# Altium PCB PCB_2020-04-05 13_27_25.pcbdoc
Units mil, origin at the board's own origin, x right, y up, seen from the top; angles counter-clockwise.
Board outline 12860 x 8910 mil, 2 copper layers (Top Layer, Bottom Layer); 150 components, 113 nets, 598 pads, 154 vias.
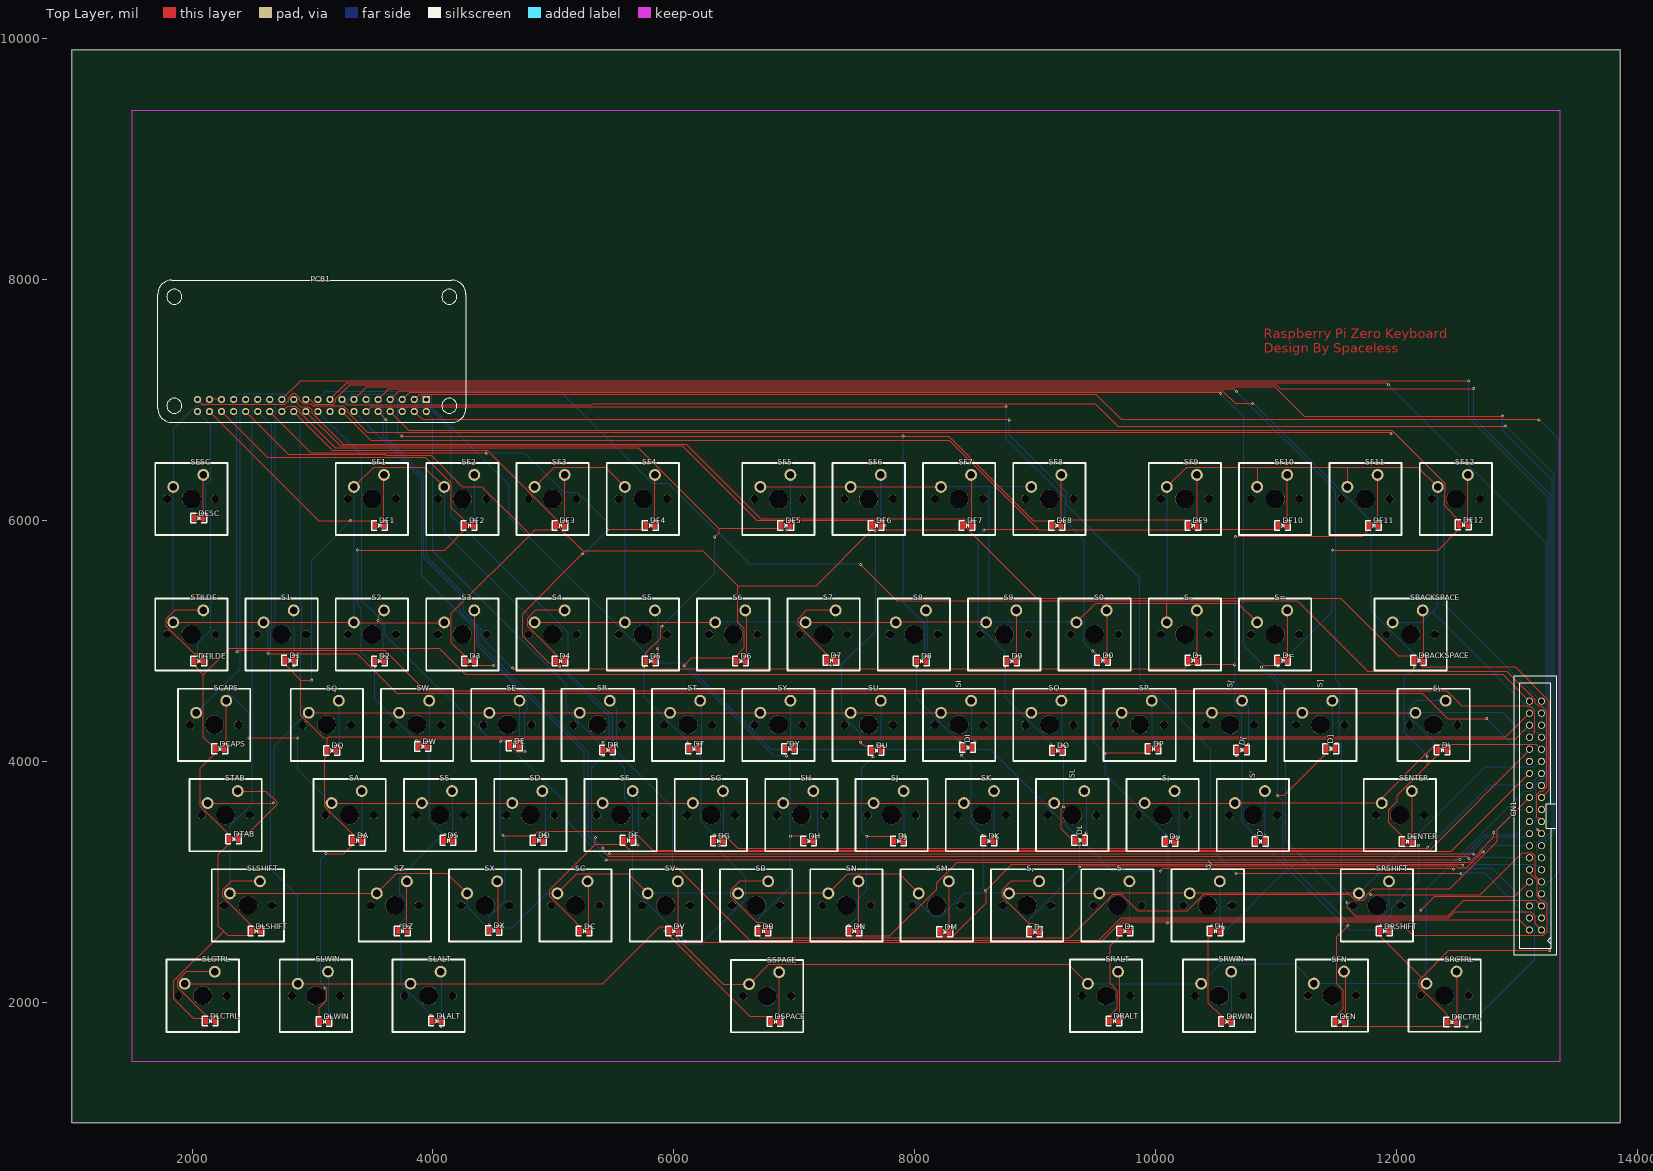
[diagram p0: Top Layer view]
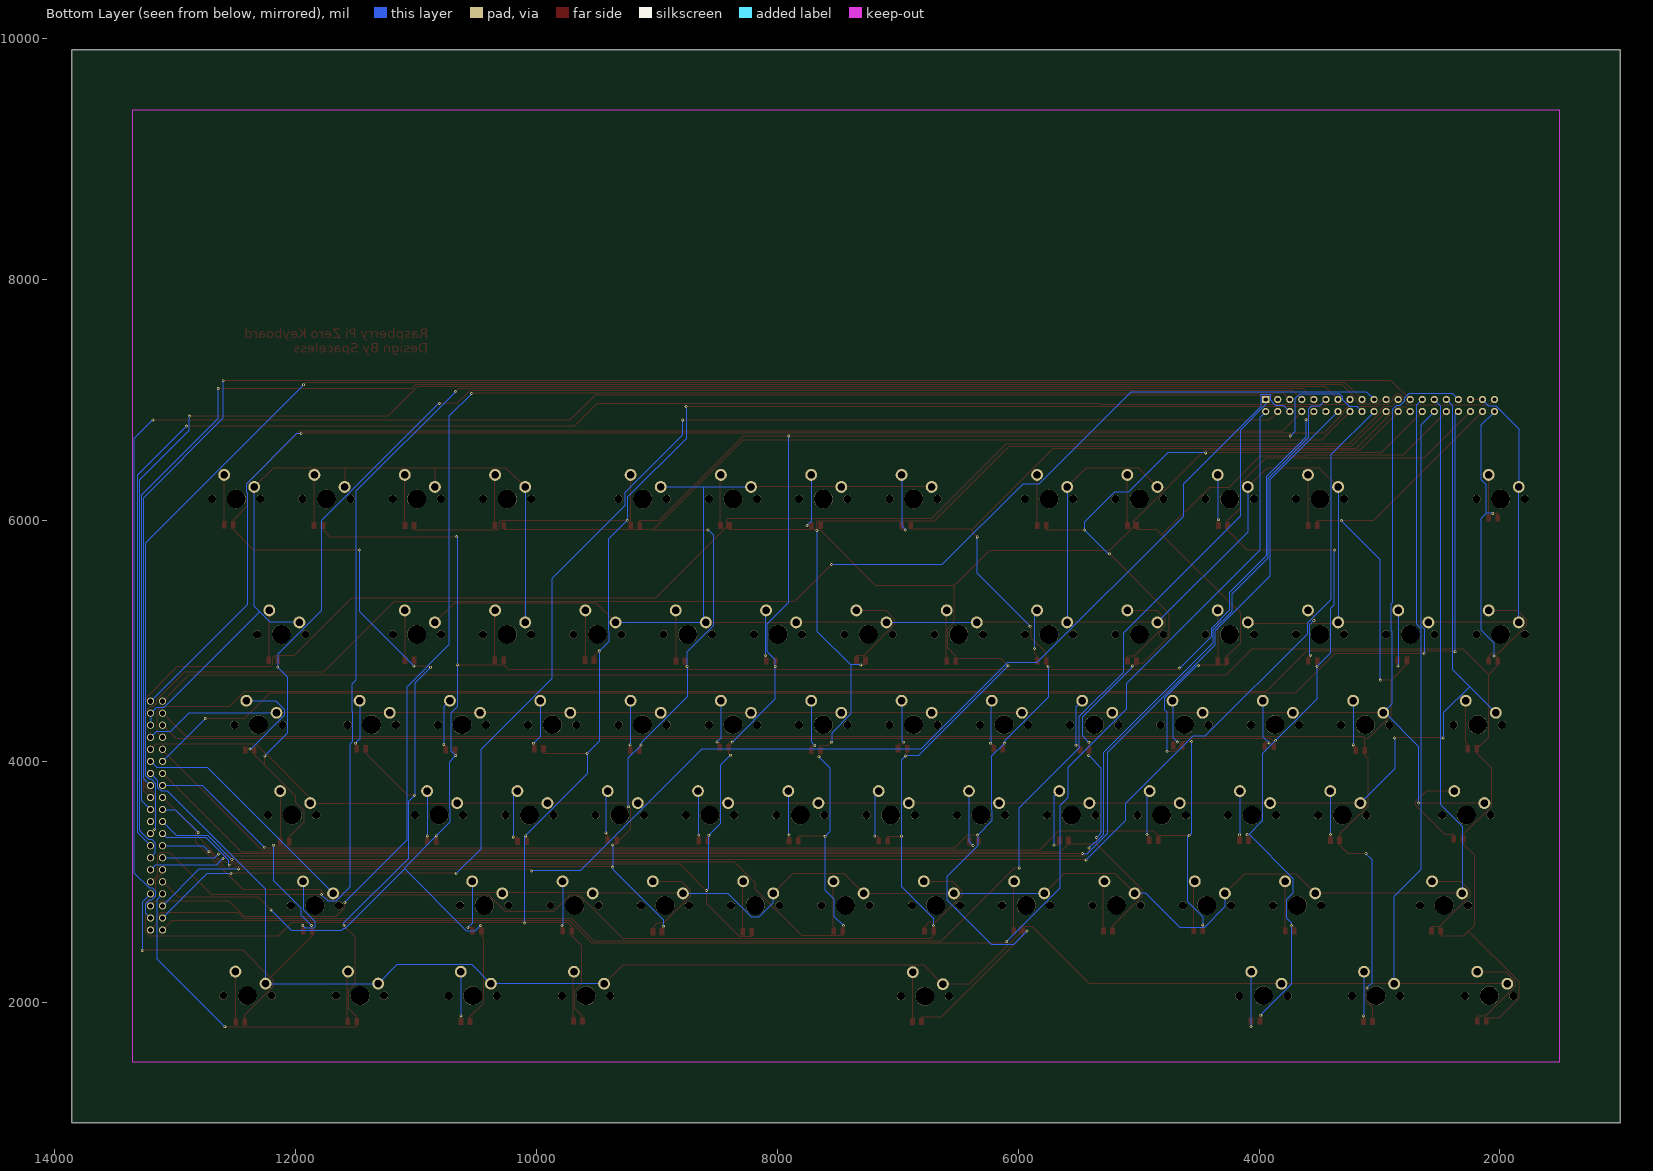
[diagram p1: Bottom Layer view, seen from below]

## Layer stack, top to bottom
Top Layer: signal copper (thickness not stored)
Dielectric: dielectric 12.6, FR-4, Dk 4.8
Bottom Layer: signal copper (thickness not stored)

## Board outline
13860,1000 1000,1000 1000,9910 13860,9910

## Components (designator, comment, footprint, x,y, rotation, side; value= is the part's Value field where it differs from the comment)
CN1 "RASPBERRYPI" HDR-IDC-2.54-2X20P 13155,3550 r90 top
D0 "1N4148" 0805D 9560,4840 r0 top
D1 "1N4148" 0805D 2810,4840 r0 top
D2 "1N4148" 0805D 3555,4835 r0 top
D3 "1N4148" 0805D 4305,4835 r0 top
D4 "1N4148" 0805D 5055,4835 r0 top
D5 "1N4148" 0805D 5805,4835 r0 top
D6 "1N4148" 0805D 6555,4835 r0 top
D7 "1N4148" 0805D 7305,4840 r0 top
D8 "1N4148" 0805D 8055,4835 r0 top
D9 "1N4148" 0805D 8805,4835 r0 top
D' "1N4148" 0805D 10870,3335 r0 top
D, "1N4148" 0805D 8995,2585 r0 top
D- "1N4148" 0805D 10310,4840 r0 top
D. "1N4148" 0805D 9745,2590 r0 top
D/ "1N4148" 0805D 10495,2590 r0 top
D; "1N4148" 0805D 10120,3335 r0 top
D= "1N4148" 0805D 11055,4840 r0 top
D[ "1N4148" 0805D 10715,4095 r0 top
D\ "1N4148" 0805D 12380,4095 r0 top
D] "1N4148" 0805D 11455,4105 r0 top
DA "1N4148" 0805D 3370,3345 r0 top
DB "1N4148" 0805D 6740,2590 r0 top
DBACKSPACE "1N4148" 0805D 12185,4840 r0 top
DC "1N4148" 0805D 5255,2590 r0 top
DCAPS "1N4148" 0805D 2230,4105 r0 top
DD "1N4148" 0805D 4875,3345 r0 top
DE "1N4148" 0805D 4675,4130 r0 top
DENTER "1N4148" 0805D 12090,3335 r0 top
DESC "1N4148" 0805D 2055,6020 r0 top
DF "1N4148" 0805D 5620,3345 r0 top
DF1 "1N4148" 0805D 3555,5960 r0 top
DF2 "1N4148" 0805D 4300,5960 r0 top
DF3 "1N4148" 0805D 5055,5960 r0 top
DF4 "1N4148" 0805D 5805,5960 r0 top
DF5 "1N4148" 0805D 6930,5960 r0 top
DF6 "1N4148" 0805D 7680,5960 r0 top
DF7 "1N4148" 0805D 8435,5960 r0 top
DF8 "1N4148" 0805D 9180,5960 r0 top
DF9 "1N4148" 0805D 10310,5960 r0 top
DF10 "1N4148" 0805D 11055,5960 r0 top
DF11 "1N4148" 0805D 11810,5960 r0 top
DF12 "1N4148" 0805D 12555,5965 r0 top
DFN "1N4148" 0805D 11530,1840 r0 top
DG "1N4148" 0805D 6370,3340 r0 top
DH "1N4148" 0805D 7120,3340 r0 top
DI "1N4148" 0805D 8440,4115 r0 top
DJ "1N4148" 0805D 7865,3340 r0 top
DK "1N4148" 0805D 8615,3340 r0 top
DL "1N4148" 0805D 9370,3345 r0 top
DLALT "1N4148" 0805D 4030,1845 r0 top
DLCTRL "1N4148" 0805D 2150,1845 r0 top
DLSHIFT "1N4148" 0805D 2530,2590 r0 top
DLWIN "1N4148" 0805D 3095,1840 r0 top
DM "1N4148" 0805D 8250,2585 r0 top
DN "1N4148" 0805D 7495,2590 r0 top
DO "1N4148" 0805D 9185,4090 r0 top
DP "1N4148" 0805D 9980,4105 r0 top
DQ "1N4148" 0805D 3160,4090 r0 top
DR "1N4148" 0805D 5450,4095 r0 top
DRALT "1N4148" 0805D 9655,1845 r0 top
DRCTRL "1N4148" 0805D 12460,1835 r0 top
DRSHIFT "1N4148" 0805D 11900,2590 r0 top
DRWIN "1N4148" 0805D 10590,1840 r0 top
DS "1N4148" 0805D 4125,3345 r0 top
DSPACE "1N4148" 0805D 6840,1840 r0 top
DT "1N4148" 0805D 6165,4105 r0 top
DTAB "1N4148" 0805D 2345,3355 r0 top
DTILDE "1N4148" 0805D 2055,4835 r0 top
DU "1N4148" 0805D 7680,4090 r0 top
DV "1N4148" 0805D 6000,2590 r0 top
DW "1N4148" 0805D 3915,4125 r0 top
DX "1N4148" 0805D 4505,2595 r0 top
DY "1N4148" 0805D 6960,4105 r0 top
DZ "1N4148" 0805D 3745,2590 r0 top
PCB1 "树莓派 zero w BCM编码引脚" "RASPBERRY PI ZERO (FACE UP) OUTLINE" 1715,6815 r0 top
S0 "MX1A" MX1A 6400,9460 r0 top
S1 "MX1A" MX1A -350,9460 r0 top
S2 "MX1A" MX1A 400,9460 r0 top
S3 "MX1A" MX1A 1150,9460 r0 top
S4 "MX1A" MX1A 1900,9460 r0 top
S5 "MX1A" MX1A 2650,9460 r0 top
S6 "MX1A" MX1A 3400,9460 r0 top
S7 "MX1A" MX1A 4150,9460 r0 top
S8 "MX1A" MX1A 4900,9460 r0 top
S9 "MX1A" MX1A 5650,9460 r0 top
S' "MX1A" MX1A 7715,7960 r0 top
S, "MX1A" MX1A 5840,7210 r0 top
S- "MX1A" MX1A 7150,9460 r0 top
S. "MX1A" MX1A 6590,7210 r0 top
S/ "MX1A" MX1A 7340,7210 r0 top
S; "MX1A" MX1A 6965,7960 r0 top
S= "MX1A" MX1A 7900,9460 r0 top
S[ "MX1A" MX1A 7525,8710 r0 top
S\ "MX1A" MX1A 9215,8710 r0 top
S] "MX1A" MX1A 8275,8710 r0 top
SA "MX1A" MX1A 215,7960 r0 top
SB "MX1A" MX1A 3590,7210 r0 top
SBACKSPACE "MX1A" MX1A 9025,9460 r0 top
SC "MX1A" MX1A 2090,7210 r0 top
SCAPS "MX1A" MX1A -910,8710 r0 top
SD "MX1A" MX1A 1715,7960 r0 top
SE "MX1A" MX1A 1525,8710 r0 top
SENTER "MX1A" MX1A 8935,7960 r0 top
SESC "MX1A" MX1A -1100,10585 r0 top
SF "MX1A" MX1A 2465,7960 r0 top
SF1 "MX1A" MX1A 400,10585 r0 top
SF2 "MX1A" MX1A 1150,10585 r0 top
SF3 "MX1A" MX1A 1900,10585 r0 top
SF4 "MX1A" MX1A 2650,10585 r0 top
SF5 "MX1A" MX1A 3775,10585 r0 top
SF6 "MX1A" MX1A 4525,10585 r0 top
SF7 "MX1A" MX1A 5275,10585 r0 top
SF8 "MX1A" MX1A 6025,10585 r0 top
SF9 "MX1A" MX1A 7150,10585 r0 top
SF10 "MX1A" MX1A 7900,10585 r0 top
SF11 "MX1A" MX1A 8650,10585 r0 top
SF12 "MX1A" MX1A 9400,10585 r0 top
SFN "MX1A" MX1A_NO3D 11465,2055 r0 top
SG "MX1A" MX1A 3215,7960 r0 top
SH "MX1A" MX1A 3965,7960 r0 top
SI "MX1A" MX1A 5275,8710 r0 top
SJ "MX1A" MX1A 4715,7960 r0 top
SK "MX1A" MX1A 5465,7960 r0 top
SL "MX1A" MX1A 6215,7960 r0 top
SLALT "MX1A" MX1A 870,6460 r0 top
SLCTRL "MX1A" MX1A -1005,6460 r0 top
SLSHIFT "MX1A" MX1A -630,7210 r0 top
SLWIN "MX1A" MX1A -65,6460 r0 top
SM "MX1A" MX1A 5090,7210 r0 top
SN "MX1A" MX1A 4340,7210 r0 top
SO "MX1A" MX1A 6025,8710 r0 top
SP "MX1A" MX1A 6775,8710 r0 top
SQ "MX1A" MX1A 25,8710 r0 top
SR "MX1A" MX1A 2275,8710 r0 top
SRALT "MX1A" MX1A 6495,6460 r0 top
SRCTRL "MX1A" MX1A_NO3D 12400,2055 r0 top
SRSHIFT "MX1A" MX1A 8745,7210 r0 top
SRWIN "MX1A" MX1A 7435,6460 r0 top
SS "MX1A" MX1A 965,7960 r0 top
SSPACE "MX1A" MX1A_NO3D 6775,2050 r0 top
ST "MX1A" MX1A 3025,8710 r0 top
STAB "MX1A" MX1A -815,7960 r0 top
STILDE "MX1A" MX1A -1100,9460 r0 top
SU "MX1A" MX1A 4525,8710 r0 top
SV "MX1A" MX1A 2840,7210 r0 top
SW "MX1A" MX1A 775,8710 r0 top
SX "MX1A" MX1A 1340,7210 r0 top
SY "MX1A" MX1A 3775,8710 r0 top
SZ "MX1A" MX1A 590,7210 r0 top

## Footprints (in the part's own frame and the unit in brackets; to place one, negate y for a bottom-side part, rotate by r counter-clockwise, add the part's x,y. Pads: shape width x height; smd on the part's side, far side on the other; paste and mask are expansions set on the pad)
0805D [mil]
  round 0 smd: 1(-37.5,0) 2(37.5,0)
  Top Layer region: -55,27.5 -20,27.5 -20,-27.5 -55,-27.5
  Top Layer region: 20,27.5 55,27.5 55,-27.5 20,-27.5
  silkscreen extent -65,-40 65,40
HDR-IDC-2.54-2X20P [mil]
  round 60 hole 43.3: 1(-950,-50) 2(-950,50) 3(-850,-50) 4(-850,50) 5(-750,-50) 6(-750,50) 7(-650,-50) 8(-650,50) 9(-550,-50) 10(-550,50) 11(-450,-50) 12(-450,50) 13(-350,-50) 14(-350,50) 15(-250,-50) 16(-250,50) 17(-150,-50) 18(-150,50) 19(-50,-50) 20(-50,50) 21(50,-50) 22(50,50) 23(150,-50) 24(150,50) 25(250,-50) 26(250,50) 27(350,-50) 28(350,50) 29(450,-50) 30(450,50) 31(550,-50) 32(550,50) 33(650,-50) 34(650,50) 35(750,-50) 36(750,50) 37(850,-50) 38(850,50) 39(950,-50) 40(950,50)
  silkscreen extent -1161,-177 1160,178
MX1A [mil]
  round 98.4 hole 59.1 slot 59.3 at 0 deg: 1(2943.79,-4306.29) 2(3193.79,-4206.29)
  round 66.9 hole 66.9 unplated: ""(2893.79,-4406.29) ""(3293.79,-4406.29)
  round 156.7 hole 156.7 unplated: ""(3093.79,-4406.29)
  silkscreen extent 2794,-4706 3394,-4106
MX1A_NO3D [mil]
  round 98.4 hole 59.1 slot 59.3 at 0 deg: 1(-150,100) 2(100,200)
  round 66.9 hole 66.9 unplated: ""(-200,0) ""(200,0)
  round 156.7 hole 156.7 unplated: ""(0,0)
  silkscreen extent -300,-300 300,300
"RASPBERRY PI ZERO (FACE UP) OUTLINE" [mil]
  rect 60x60 hole 36: 1(2230,190)
  round 60 hole 36: 2(2230,90) 3(2130,190) 4(2130,90) 5(2030,190) 6(2030,90) 7(1930,190) 8(1930,90) 9(1830,190) 10(1830,90) 11(1730,190) 12(1730,90) 13(1630,190) 14(1630,90) 15(1530,190) 16(1530,90) 17(1430,190) 18(1430,90) 19(1330,190) 20(1330,90) 21(1230,190) 22(1230,90) 23(1130,190) 24(1130,90) 25(1030,190) 26(1030,90) 27(930,190) 28(930,90) 29(830,190) 30(830,90) 31(730,190) 32(730,90) 33(630,190) 34(630,90) 35(530,190) 36(530,90) 37(430,190) 38(430,90) 39(330,190) 40(330,90)
  silkscreen extent 0,0 2559,1181

## Via types
v1: diameter 24, hole 12, Top Layer to Bottom Layer, 154 vias

## Nets (pads, with @x,y where several pads share a name; then routed paths per layer and width w, separated by ;. In a path a pad name is that pad's centre, name@x,y a point inside that pad or via, vN(x,y) a via of type N, cw(c..) or ccw(c..) an arc to the next point about the centre after c; other vN are vias at no path point)
COL1: CN1.40 DCAPS.1 DESC.1 DLCTRL.1 DLSHIFT.1 DTAB.1 DTILDE.1 PCB1.40 | length 17531.4
  Top Layer w10: DESC.1 2017.5,6058.6 v1(2059.6,6058.6) ; v1(2049.1,4874.9) 2047.8,4873.6 2017.5,4873.6 DTILDE.1 2017.5,4796.4 2094.1,4719.8 ; DLCTRL.1 2090,1867.5 2010.4,1867.5 1844.2,2033.7 1844.2,2173.2 2261,2590 ; DCAPS.1 2192.5,4102.8 ; DLSHIFT.1 2492.5,2551.4 2299.6,2551.4 2261,2590 ; CN1.40 12887.7,4717.3 4274,4717.3 4056.9,4934.4 2308.7,4934.4 2094.1,4719.8 ; 2094.1,4719.8 2094.1,4201.2 2192.5,4102.8 ; 2192.5,4102.8 2192.5,4085.7 2192.5,4066.4 2068.2,3942.1 2068.2,3629 2303.6,3393.6 2307.5,3393.6 DTAB.1 2307.5,3335.7 2307.5,3316.4 2215.1,3224 2215.1,2635.9 2261,2590
  Bottom Layer w10: PCB1.40 2154.8,6795.2 2154.8,6337.9 2115.6,6298.7 2115.6,6058.6 ; v1(2049.1,4874.9) 2049.1,4982.5 2156,5089.4 2156,6018.2 2115.6,6058.6 ; v1(2059.6,6058.6) 2115.6,6058.6
COL2: CN1.38 D1.1 DA.1 DF1.1 DLWIN.1 DQ.1 PCB1.38 | length 16920.7
  Top Layer w10: PCB1.38 3051.4,5998.6 v1(3316.1,5998.6) 3517.5,5998.6 DF1.1 ; D1.1 2772.5,4801.4 2777.5,4801.4 2903.9,4675 ; v1(2993.8,4675) 2903.9,4675 ; DLWIN.1 3057.5,1952.6 3119.6,2014.7 3119.6,2104 v1(3105.4,2118.3) ; v1(3113.7,3235) 3261.1,3235 3332.5,3306.4 DA.1 3332.5,3393 3096.1,3629.4 3096.1,4025 3122.5,4051.4 DQ.1 3122.5,4109.3 3122.5,4128.6 3122.5,4191.7 ; CN1.38 12908.5,4203.5 3134.3,4203.5 3122.5,4191.7 ; 2903.9,4675 2903.9,4381.6 3093.8,4191.7 3122.5,4191.7
  Bottom Layer w10: v1(2993.8,4675) 2993.8,5676.2 v1(3316.1,5998.6) ; v1(3105.4,2118.3) 3065.8,2157.8 3065.8,3187.2 v1(3113.7,3235)
COL3: CN1.36 D2.1 DF2.1 DLALT.1 DS.1 DW.1 DZ.1 PCB1.36 | length 17568.8
  Top Layer w10: PCB1.36 2629.9,6520.1 3941.4,6520.1 4154.1,6307.4 4154.1,6107 4262.5,5998.6 DF2.1 4262.5,5921.4 4096.1,5755 v1(3374.1,5755) ; v1(3517.5,4789) D2.1 ; DZ.1 3707.5,2628.6 3723.6,2628.6 v1(3731.5,2636.5) ; v1(3863.7,4171.8) 3869.3,4171.8 3877.5,4163.6 ; DW.1 3877.5,4163.6 ; v1(3985.1,1891.6) 3992.5,1884.2 DLALT.1 ; DS.1 4087.5,3383.6 4091.2,3383.6 v1(4098.9,3391.2) ; CN1.36 12992.4,4187.3 3901.3,4187.3 3877.5,4163.6
  Bottom Layer w10: v1(3374.1,5755) 3374.1,5299.9 3404.1,5269.9 3404.1,4902.4 v1(3517.5,4789) 3517.5,4518 v1(3863.7,4171.8) 3969.2,4066.3 3969.2,3509.2 4083.5,3394.9 ; v1(3985.1,1891.6) 3985.1,1895.4 3731.5,2149 v1(3731.5,2636.5) 3731.5,2660.4 3773.3,2702.2 3773.3,2851.2 3719.6,2904.9 3719.6,3031 4083.5,3394.9 ; v1(4098.9,3391.2) 4087.2,3391.2 4083.5,3394.9
COL4: CN1.32 D3.1 DD.1 DE.1 DF3.1 DX.1 PCB1.32 | length 16440.2
  Top Layer w10: PCB1.32 2803.4,6546.6 3602.1,6546.6 3612.5,6536.2 3989.5,6536.2 4247.5,6278.2 4411.3,6278.2 4807.2,5882.3 ; DX.1 v1(4467.5,2641.9) ; v1(4503.8,4796.4) 4267.5,4796.4 D3.1 4267.5,4873.6 4154.1,4987 4154.1,5229.3 4807.2,5882.3 ; v1(4560.1,4163.8) 4564.8,4168.6 4637.5,4168.6 4637.5,4149.3 ; v1(4581,3383.6) 4837.5,3383.6 ; DE.1 4637.5,4149.3 ; v1(4764.4,4080.9) 4700.9,4080.9 4637.5,4144.3 4637.5,4149.3 ; DD.1 4837.5,3383.6 ; DF3.1 5017.5,5921.4 4846.2,5921.4 4807.2,5882.3 ; CN1.32 13105,4091.3 12277.8,3264.1 5823.7,3264.1 5667.2,3420.6 4874.5,3420.6 4837.5,3383.6
  Bottom Layer w10: v1(4467.5,2641.9) 4467.5,2710.9 4594.5,2837.9 4594.5,3370.1 v1(4581,3383.6) 4560.1,3404.5 v1(4560.1,4163.8) ; v1(4503.8,4796.4) 4514.3,4796.4 4781.4,4529.3 4781.4,4425.7 4764.4,4408.6 v1(4764.4,4080.9)
COL5: CN1.28 D4.1 DC.1 DF4.1 DF.1 DR.1 PCB1.28 | length 16027.8
  Top Layer w10: PCB1.28 2987.3,6562.7 4441.1,6562.7 v1(4442.4,6561.4) ; D4.1 5017.5,4815.7 ; v1(5053.5,4793.2) 5050.3,4796.4 5017.5,4796.4 5017.5,4815.7 ; DC.1 5217.5,2633 4971.2,2879.3 4971.2,2936 5348.8,3313.5 ; v1(5241,5724.1) 4743.8,5226.9 4743.8,5038.2 4966.4,4815.7 5017.5,4815.7 ; v1(5348.8,3367.8) 5348.8,3313.5 ; v1(5413,4158.9) 5413,4134 5412.5,4133.6 DR.1 5412.5,4052.1 v1(5415.2,4049.4) ; v1(5450.5,5921.4) 5767.5,5921.4 DF4.1 ; DF.1 5582.5,3313.5 ; CN1.28 12453,3248 5648.1,3248 5582.5,3313.5 ; 5348.8,3313.5 5582.5,3313.5
  Bottom Layer w10: v1(4442.4,6561.4) 4758.3,6561.4 5084.5,6235.3 5201.5,6235.3 5450.5,5986.3 v1(5450.5,5921.4) 5253.2,5724.1 v1(5241,5724.1) ; v1(5053.5,4793.2) 5053.5,4781.4 5463.9,4371.1 5463.9,4209.8 v1(5413,4158.9) ; v1(5348.8,3367.8) 5312.6,3404 5312.6,3946.8 v1(5415.2,4049.4)
COL6: CN1.26 D5.1 DF5.1 DG.1 DSPACE.1 DT.1 DV.1 PCB1.26 | length 17552.9
  Top Layer w10: PCB1.26 2786.1,6946.1 2862.7,6946.1 2892.4,6916.4 2892.4,6899.5 3191.2,6600.7 5707.1,6600.7 6375.5,5932.3 ; v1(5751.5,4789.1) 5758.7,4796.4 5767.5,4796.4 5767.5,4819.7 D5.1 5767.5,4902 5889.9,5024.4 5889.9,5110.4 v1(5901.3,5121.8) ; v1(5926.7,2591.7) 5960.8,2591.7 DV.1 5962.5,2551.4 6635.3,1878.6 6802.5,1878.6 DSPACE.1 ; v1(6112.3,4151.6) 6120.4,4143.6 6127.5,4143.6 DT.1 ; DG.1 6332.5,3383.2 v1(6336.5,3387.2) 6422.6,3387.2 6529.7,3280.2 12254,3280.2 v1(12261,3287.2) ; v1(6340,5864.1) 6375.5,5899.5 6375.5,5932.3 ; DF5.1 6892.5,5932.3 6375.5,5932.3
  Bottom Layer w10: v1(5751.5,4789.1) 5751.5,4534.1 6112.3,4173.2 v1(6112.3,4151.6) 6223,4040.9 6223,3597.1 6217.8,3591.8 6217.8,3506 v1(6336.5,3387.2) 6336.5,3298.4 6594.3,3040.6 6594.3,2851 6225,2481.6 6036.8,2481.6 v1(5926.7,2591.7) ; v1(5901.3,5121.8) 6340,5560.6 v1(6340,5864.1) ; v1(12261,3287.2) 12773.8,3800 CN1.26
COL7: CN1.24 D6.1 DB.1 DF6.1 DH.1 DY.1 PCB1.24 | length 16904.6
  Top Layer w10: PCB1.24 3165.5,6584.5 4452.1,6584.5 5038,5998.6 5043.2,5998.6 5046.1,5995.7 5046.1,5945.5 5244.4,5747.2 6242,5747.2 6529.1,5460 ; v1(6083.4,4794.4) 6143.3,4854.3 6517.5,4854.3 ; D6.1 6517.5,4854.3 ; v1(6702.5,2635.6) DB.1 6702.5,2551.4 6723.6,2530.3 9283.9,2530.3 9646.7,2893.1 9720.9,2893.1 9858.6,2755.4 10259,2755.4 10396.7,2893.1 11614.1,2893.1 11664.2,2843 11718.3,2843 11750.5,2875.2 11750.5,2890.3 11799.9,2939.7 12441,2939.7 12832.4,3331 12832.4,3427.4 CN1.24 ; DY.1 6922.5,4059 v1(6935.3,4046.2) ; v1(6969.1,3378.6) 7082.5,3378.6 DH.1 ; DF6.1 7642.5,5921.4 7181.1,5460 6529.1,5460 ; 6517.5,4854.3 6517.5,4873.6 6585.7,4941.8 6585.7,5100.6 6529.1,5157.2 6529.1,5460
  Bottom Layer w10: v1(6083.4,4794.4) 6831.5,4046.2 v1(6935.3,4046.2) 6969.1,4012.4 v1(6969.1,3378.6) 6969.1,2960 6702.5,2693.4 v1(6702.5,2635.6)
COL8: CN1.22 D7.1 DF7.1 DJ.1 DN.1 DU.1 PCB1.22 | length 16260.1
  Top Layer w10: PCB1.22 3233.2,6616.8 6074,6616.8 6692.1,5998.6 7664.8,5998.6 7672.4,5991 v1@7672.4,5921.4 ; D7.1 7267.5,4801.4 v1(7306.1,4801.4) ; v1(7450.6,2635.7) 7457.5,2628.8 DN.1 7457.5,2551.4 7794.5,2551.4 8182.3,2939.2 8182.3,2992 8352.3,3162 12607.4,3162 12695,3249.6 12695,3259 12808.2,3372.2 12808.3,3372.2 v1(12808.3,3410) ; v1(7550,4158.7) 7580,4128.6 7642.5,4128.6 DU.1 7642.5,4051.2 v1(7655,4038.7) ; v1(7603.2,3378.6) 7827.5,3378.6 DJ.1 ; v1(7672.4,5918.7) v1@7672.4,5921.4 ; DF7.1 8397.5,5921.4 v1@7672.4,5921.4
  Bottom Layer w10: v1(7306.1,4801.4) 7391.6,4801.4 ; v1(7450.6,2635.7) 7525.7,2710.8 7525.7,2853.4 7603.1,2930.8 v1@7603.1,3378.6 ; v1(7550,4158.7) 7550,4235.6 7391.6,4394 7391.6,4801.4 ; v1(7603.2,3378.6) v1@7603.1,3378.6 ; v1(7655,4038.7) 7560.7,3944.5 7560.7,3421.1 v1@7603.1,3378.6 ; v1(7672.4,5918.7) 7672.4,5082.2 7391.6,4801.4 ; v1(12808.3,3410) 12998.2,3600 CN1.22
COL9: CN1.18 D8.1 DF8.1 DI.1 DK.1 DM.1 PCB1.18 | length 16311.5
  Top Layer w10: v1(3741,6701.6) v1(7905.3,6701.6) 8281.7,6701.6 8984.7,5998.6 9142.5,5998.6 DF8.1 ; v1(8017.5,4788.8) D8.1 ; DM.1 8212.5,2546.4 8314.9,2546.4 8588.7,2820.2 v1(8588.7,2927.6) 8807,3145.9 12543.2,3145.9 v1(12551.2,3137.8) ; v1(8375.8,4159.7) 8381.9,4153.6 8402.5,4153.6 DI.1 8402.5,4064.5 v1(8389.3,4051.2) ; v1(8569.1,3387) 8577.5,3378.6 DK.1
  Bottom Layer w10: PCB1.18 3186.1,6946.1 3246.8,6946.1 3303.1,7002.4 3303.1,7024.2 3328.9,7050 3663.4,7050 3703.9,7009.5 3703.9,6738.7 v1(3741,6701.6) ; v1(7905.3,6701.6) 7905.3,5322.4 8083.4,5144.3 8083.4,4911.1 8017.5,4845.2 v1(8017.5,4788.8) 8017.5,4518 v1(8375.8,4159.7) ; v1(8389.3,4051.2) 8469.1,3971.4 8469.1,3487 v1(8569.1,3387) 8569.1,2947.3 v1(8588.7,2927.6) ; v1(12551.2,3137.8) 12559.3,3145.9 12559.3,3184.9 12745.2,3370.8 13075.8,3370.8 CN1.18
COL10: CN1.16 D9.1 D,.1 DF9.1 DL.1 DO.1 PCB1.16 | length 15812.1
  Top Layer w10: PCB1.16 3484.5,6665.5 8287.5,6665.5 9031.6,5921.4 ; v1(8575.2,5921.4) 9031.6,5921.4 ; v1(8749,4788.2) 8757.2,4796.4 8767.5,4796.4 D9.1 ; v1(8946.7,2631.1) 8954.2,2623.6 8957.5,2623.6 8957.5,2585 ; v1(9130.7,4135.9) 9138.1,4128.6 9147.5,4128.6 DO.1 ; v1(9236.4,3623.2) 9219.3,3606.1 9219.3,3438.9 9332.5,3325.7 ; DL.1 9332.5,3325.7 ; v1(9368.1,3122.3) 9375.6,3129.8 12505.5,3129.8 12523.9,3111.3 12580.1,3111.3 v1(12718.1,3249.4) ; v1(9368.1,3306.4) 9332.5,3306.4 9332.5,3325.7 ; DF9.1 10272.5,5921.4 9031.6,5921.4
  Bottom Layer w10: v1(8575.2,5921.4) 8530.1,5876.2 8530.1,5130.4 8749,4911.5 v1(8749,4788.2) 8749,4536.6 9130.7,4154.8 v1(9130.7,4135.9) 9236.4,4030.2 v1(9236.4,3623.2) ; v1(8946.7,2631.1) 8946.7,2684.3 9368.1,3105.7 v1(9368.1,3122.3) v1(9368.1,3306.4) ; v1(12718.1,3249.4) 12768.7,3300 CN1.16
COL11: CN1.12 D0.1 D..1 D;.1 DF10.1 DP.1 DRALT.1 PCB1.12 | length 17684.6
  Top Layer w10: PCB1.12 3486.4,6946.4 v1(8757.4,6946.4) ; v1(9246.3,6002.5) 10291.2,6002.5 10307.5,5986.2 10307.5,5935.7 10321.8,5921.4 11017.5,5921.4 DF10.1 ; v1(9479,4915) 9486.1,4915 9522.5,4878.6 D0.1 ; v1(9579.7,4066.4) 9942.5,4066.4 DP.1 ; DRALT.1 9617.5,1883.6 9684.4,1950.5 9684.4,2096.9 9624.5,2156.9 9624.5,2468.4 9707.5,2551.4 D..1 9707.5,2628.6 9742.1,2663.2 v1@10099.9,2663.2 ; 10082.5,3335 10082.5,3374.8 v1(10089.5,3381.8) ; v1(10099.9,2657.3) v1@10099.9,2663.2 ; CN1.12 13105,3077.2 13163.9,3018.3 13163.9,2882.6 13199.2,2847.3 13224.8,2847.3 13250.3,2821.7 13250.3,2584.5 13217.5,2551.7 12140,2551.7 12028.4,2663.2 v1@10099.9,2663.2
  Bottom Layer w10: v1(8757.4,6946.4) 8757.4,6680.1 9246.3,6191.2 v1(9246.3,6002.5) 9405.7,5843.1 9405.7,5092.1 9400.1,5086.6 9400.1,4993.9 v1(9479,4915) 9479,4167 v1(9579.7,4066.4) 9579.7,3895.8 10089.5,3386.1 v1(10089.5,3381.8) 10099.9,3371.4 v1(10099.9,2657.3)
COL12: CN1.10 D'.1 D-.1 D/.1 D[.1 DF11.1 DRWIN.1 PCB1.10 | length 16998.1
  Top Layer w10: PCB1.10 3545,6902.2 v1(3610.6,6836.5) ; v1(4659.7,4774.6) 4669.7,4764.6 10235.7,4764.6 10272.5,4801.4 ; D-.1 10272.5,4801.4 ; v1(10463.8,2637.8) 10457.5,2631.6 D/.1 10457.5,2551.4 10439.1,2533 10439.1,1992 10552.5,1878.6 DRWIN.1 ; v1(10657.5,4801.4) 10272.5,4801.4 ; v1(10664.9,5865.7) 11716.8,5865.7 11772.5,5921.4 DF11.1 ; v1(10670.2,4049.1) 10677.5,4056.4 D[.1 ; D'.1 v1(10832.5,3380.8) ; v1(12205.5,2766.4) 12313.3,2874.2 12979.2,2874.2 CN1.10
  Bottom Layer w10: v1(3610.6,6836.5) 3610.6,6691.7 3939.6,6362.7 3939.6,5707.1 4246.4,5400.3 4246.4,5253.5 4397.4,5102.5 4397.4,5036.9 v1(4659.7,4774.6) ; v1(10463.8,2637.8) 10507.3,2594.2 10582.4,2594.2 11095.5,3107.4 ; v1(10664.9,5865.7) 10657.5,5858.2 v1(10657.5,4801.4) 10657.5,4453.1 10710.7,4399.9 10710.7,4089.6 v1(10670.2,4049.1) 10721.7,3997.6 10721.7,3603.6 10716.1,3598 10716.1,3497.2 v1(10832.5,3380.8) 11095.5,3117.8 11095.5,3107.4 ; v1(12205.5,2766.4) 12036.2,2597 11616.3,2597 11599.8,2613.5 11589.4,2613.5 11095.5,3107.4
COL13: CN1.8 D=.1 D].1 DF12.1 DFN.1 PCB1.8 | length 18305.6
  Top Layer w10: PCB1.8 3803.9,6746.1 11964.9,6746.1 12407.4,6303.5 12407.4,6229.3 12400.3,6222.2 12400.3,6120.7 12517.5,6003.6 DF12.1 12517.5,5926.4 12346.1,5755 v1(11468.5,5755) ; v1(10880.1,4781.4) 10891.7,4793 v1(11017.5,4793) D=.1 ; v1(11012.1,3716.9) 11068,3716.9 11417.5,4066.4 D].1 ; v1(11598.9,2636.6) 11504.1,2541.8 11504.1,2154.7 11559.4,2099.4 11559.4,1945.5 11492.5,1878.6 DFN.1 11492.5,1830.3 11492.5,1801.4 11497.5,1796.4 v1(12587,1796.4)
  Bottom Layer w10: v1(10880.1,4781.4) 11012.1,4649.4 v1(11012.1,3716.9) 11062.1,3666.9 11062.1,3196.4 11598.9,2659.5 v1(11598.9,2636.6) ; v1(11017.5,4793) 11468.5,5244 v1(11468.5,5755) ; v1(12587,1796.4) 13148.8,2358.2 13148.8,2856.2 CN1.8
COL14: CN1.7 D\.1 DBACKSPACE.1 DENTER.1 DRCTRL.1 DRSHIFT.1 PCB1.7 | length 15632.4
  Top Layer w10: PCB1.7 3718.4,7078.4 10554.5,7078.4 10660.2,6972.7 v1(10804.9,6972.7) ; v1(11868.2,2637.1) 11862.5,2631.4 DRSHIFT.1 11862.5,2551.4 12209.8,2204.1 ; DBACKSPACE.1 12147.5,4782.3 v1(12148.1,4781.7) ; v1(12185.4,3303.3) 12178.5,3296.4 12052.5,3296.4 DENTER.1 12052.5,3354.3 12052.5,3373.6 11932.7,3493.4 11932.7,3594.6 12002.5,3664.4 12002.5,3716.4 12256,3969.9 ; v1(12256,4045) 12256,3969.9 ; D\.1 12342.5,4056.4 12256,3969.9 ; DRCTRL.1 12422.5,1897.2 12187.6,2132.1 12187.6,2181.9 12209.8,2204.1 ; v1(13273.5,2430.7) 12436.5,2430.7 12209.8,2204.1
  Bottom Layer w10: v1(10804.9,6972.7) 10812.8,6972.7 11785.6,5999.9 11785.6,5249.9 12148.1,4887.5 v1(12148.1,4781.7) 12063.7,4697.3 12063.7,4237.3 v1(12256,4045) ; v1(11868.2,2637.1) 11955.6,2724.5 11955.6,2784.3 12185.4,3014.1 v1(12185.4,3303.3) ; CN1.7 13273.5,2831.5 v1(13273.5,2430.7)
D0_2: D0.2 S0.2 | length 415.2
  Top Layer w10: S0.2 9593.8,4882.3 9597.5,4878.6 D0.2
D1_2: D1.2 S1.2 | length 509.4
  Top Layer w10: v1(2847.5,4792.9) D1.2
  Bottom Layer w10: S1.2 2843.8,4796.6 v1(2847.5,4792.9)
D2_2: D2.2 S2.2 | length 472.7
  Top Layer w10: v1(3544.6,5170) 3544.6,5204.5 S2.2 ; v1(3574.3,4880.7) 3581.5,4873.6 3592.5,4873.6 D2.2
  Bottom Layer w10: v1(3544.6,5170) 3583.2,5131.4 3583.2,4889.7 v1(3574.3,4880.7)
D3_2: D3.2 S3.2 | length 419.2
  Top Layer w10: D3.2 4342.5,4873.6 4343.8,4874.9 S3.2
D4_2: D4.2 S4.2 | length 849.9
  Top Layer w10: D4.2 5092.5,4873.6 5036.9,4873.6 4783.3,5127.2 4783.3,5185.5 4851.5,5253.7 S4.2
D5_2: D5.2 S5.2 | length 437.8
  Top Layer w10: D5.2 5842.5,4873.6 5866.2,4897.3 v1(5866.2,4938)
  Bottom Layer w10: S5.2 5866.2,5231.3 v1(5866.2,4938)
D6_2: D6.2 S6.2 | length 425.9
  Top Layer w10: D6.2 6592.5,4873.6 6601.8,4882.9 6601.8,5245.7 S6.2
D7_2: D7.2 S7.2 | length 853.2
  Top Layer w10: D7.2 7342.5,4878.6 7281.9,4878.6 7027.7,5132.8 7027.7,5181.1 7100.3,5253.7 S7.2
D8_2: D8.2 S8.2 | length 424
  Top Layer w10: D8.2 8092.5,4873.6 v1(8099.5,4880.6)
  Bottom Layer w10: S8.2 8099.5,5248 v1(8099.5,4880.6)
D9_2: D9.2 S9.2 | length 419.2
  Top Layer w10: D9.2 8842.5,4873.6 8843.8,4874.9 S9.2
D'_2: D'.2 S'.2 | length 419.2
  Top Layer w10: D'.2 v1(10907.5,3381.3)
  Bottom Layer w10: v1(10907.5,3381.3) 10908.8,3382.6 S'.2
D,_2: D,.2 S,.2 | length 846
  Top Layer w10: 9032.5,2585 9032.5,2623.6 8999.6,2656.5 8945.7,2656.5 8723.2,2879 8723.2,2930.3 8796.6,3003.7 9033.8,3003.7
D-_2: D-.2 S-.2 | length 415.2
  Top Layer w10: S-.2 10347.5,5250 D-.2
D._2: D..2 S..2 | length 418.4
  Top Layer w10: D..2 9782.5,2628.6 9788.9,2635 v1(9788.9,2637.8)
  Bottom Layer w10: S..2 9783.8,2643 v1(9788.9,2637.8)
D/_2: D/.2 S/.2 | length 475.2
  Top Layer w10: D/.2 10532.5,2628.6 10561.8,2628.6 v1(10569.1,2621.3)
  Bottom Layer w10: S/.2 10533.8,2656.6 v1(10569.1,2621.3)
D;_2: D;.2 S;.2 | length 468.1
  Top Layer w10: 10157.5,3335 10157.5,3373.6 v1(10192.8,3373.6)
  Bottom Layer w10: 10158.8,3753.7 10192.8,3719.7 v1(10192.8,3373.6)
D=_2: D=.2 S=.2 | length 414.2
  Top Layer w10: D=.2 11092.5,4878.6 11093.8,4879.9 S=.2
D[_2: D[.2 S[.2 | length 442.8
  Top Layer w10: D[.2 10752.5,4133.6 10762.2,4133.6 v1(10770,4141.4)
  Bottom Layer w10: S[.2 10770,4452.5 v1(10770,4141.4)
D\_2: D\.2 S\.2 | length 838.3
  Top Layer w10: v1(12380,4101.2) 12411.3,4101.2 D\.2
  Bottom Layer w10: v1(12380,4101.2) 12374.3,4101.2 12093.6,4381.9 12093.6,4433 12164.3,4503.7 S\.2
D]_2: D].2 S].2 | length 421
  Top Layer w10: D].2 11492.5,4143.6 11497.2,4143.6 v1(11504.3,4150.6)
  Bottom Layer w10: S].2 11468.8,4186.2 v1(11504.3,4150.6)
DA_2: DA.2 SA.2 | length 409.2
  Top Layer w10: DA.2 v1(3407.5,3391.5)
  Bottom Layer w10: v1(3407.5,3391.5) 3408.8,3392.8 SA.2
DB_2: DB.2 SB.2 | length 841.4
  Top Layer w10: DB.2 6777.5,2628.6 6742.7,2663.4 6688.9,2663.4 6469.5,2882.7 6469.5,2925.6 6547.6,3003.7 SB.2
DBACKSPACE_2: DBACKSPACE.2 SBACKSPACE.2 | length 415.2
  Top Layer w10: SBACKSPACE.2 12222.5,5250 DBACKSPACE.2
DC_2: DC.2 SC.2 | length 417.3
  Top Layer w10: SC.2 5292.5,2995 DC.2
DCAPS_2: DCAPS.2 SCAPS.2 | length 405.5
  Top Layer w10: DCAPS.2 2267.5,4143.6 2283.8,4159.9 SCAPS.2
DD_2: DD.2 SD.2 | length 431.9
  Top Layer w10: DD.2 4912.5,3383.6 4923.4,3383.6 v1(4931,3391.2)
  Bottom Layer w10: SD.2 4931,3731.5 v1(4931,3391.2)
DE_2: DE.2 SE.2 | length 440.1
  Top Layer w10: v1(4676.3,4159.7) 4685.2,4168.6 4712.5,4168.6 DE.2
  Bottom Layer w10: v1(4676.3,4159.7) 4718.8,4202.2 SE.2
DENTER_2: DENTER.2 SENTER.2 | length 419.2
  Top Layer w10: DENTER.2 12127.5,3373.6 12128.8,3374.9 SENTER.2
DF_2: DF.2 SF.2 | length 549.6
  Top Layer w10: DF.2 5657.5,3306.4 v1(5702.9,3306.4)
  Bottom Layer w10: SF.2 5702.9,3709.6 v1(5702.9,3306.4)
DFN_2: DFN.2 SFN.2 | length 422.8
  Top Layer w10: SFN.2 11575.6,2244.4 11575.6,1886.6 11567.5,1878.6 DFN.2
DG_2: DG.2 SG.2 | length 538.8
  Top Layer w10: v1(6374,3301.4) 6407.5,3301.4 DG.2
  Bottom Layer w10: v1(6374,3301.4) 6408.8,3336.2 SG.2
DH_2: DH.2 SH.2 | length 461.4
  Top Layer w10: DH.2 7157.5,3378.6 v1(7191.6,3378.6)
  Bottom Layer w10: SH.2 7191.6,3720.9 v1(7191.6,3378.6)
DI_2: DI.2 SI.2 | length 421.3
  Top Layer w10: DI.2 8477.5,4153.6 8493.4,4153.6 v1(8501.2,4161.3)
  Bottom Layer w10: SI.2 8468.8,4193.7 v1(8501.2,4161.3)
DJ_2: DJ.2 SJ.2 | length 416.3
  Top Layer w10: DJ.2 v1(7902.5,3387.1)
  Bottom Layer w10: v1(7902.5,3387.1) 7908.8,3393.4 SJ.2
DK_2: DK.2 SK.2 | length 416.3
  Top Layer w10: DK.2 v1(8652.5,3387)
  Bottom Layer w10: v1(8652.5,3387) 8658.8,3393.3 SK.2
DL_2: DL.2 SL.2 | length 422.2
  Top Layer w10: DL.2 9407.5,3389.9 v1(9424.4,3406.8)
  Bottom Layer w10: SL.2 9424.4,3738.1 v1(9424.4,3406.8)
DLALT_2: DLALT.2 SLALT.2 | length 501.4
  Top Layer w10: v1(4067.5,1799.4) DLALT.2
  Bottom Layer w10: SLALT.2 4067.5,2250 v1(4067.5,1799.4)
DLCTRL_2: DLCTRL.2 SLCTRL.2 | length 844.1
  Top Layer w10: DLCTRL.2 2187.5,1883.6 2121.9,1883.6 1876.8,2128.7 1876.8,2179.1 1951.4,2253.7 SLCTRL.2
DLSHIFT_2: DLSHIFT.2 SLSHIFT.2 | length 853.2
  Top Layer w10: SLSHIFT.2 2324.6,3003.7 2250.7,2929.8 2250.7,2879.8 2501.9,2628.6 2567.5,2628.6 DLSHIFT.2
DLWIN_2: DLWIN.2 SLWIN.2 | length 415.2
  Top Layer w10: DLWIN.2 v1(3132.5,1886.8)
  Bottom Layer w10: SLWIN.2 3128.8,1890.5 v1(3132.5,1886.8)
DM_2: DM.2 SM.2 | length 420.2
  Top Layer w10: SM.2 8287.5,3000 DM.2
DN_2: DN.2 SN.2 | length 414.2
  Top Layer w10: DN.2 7532.5,2628.6 7533.8,2629.9 SN.2
DO_2: DO.2 SO.2 | length 415.2
  Top Layer w10: DO.2 v1(9222.5,4137)
  Bottom Layer w10: SO.2 9222.5,4500 v1(9222.5,4137)
DP_2: DP.2 SP.2 | length 424.7
  Top Layer w10: DP.2 10017.5,4143.6 v1(10024.5,4150.6)
  Bottom Layer w10: SP.2 9968.8,4206.3 v1(10024.5,4150.6)
DQ_2: DQ.2 SQ.2 | length 429.7
  Top Layer w10: DQ.2 3197.5,4128.6 3209.8,4128.6 v1(3217.7,4136.5)
  Bottom Layer w10: v1(3217.7,4136.5) 3218.8,4137.6 SQ.2
DR_2: DR.2 SR.2 | length 464
  Top Layer w10: DR.2 5487.5,4133.6 v1(5521.1,4133.6)
  Bottom Layer w10: SR.2 5521.1,4451.4 v1(5521.1,4133.6)
DRALT_2: DRALT.2 SRALT.2 | length 417
  Top Layer w10: SRALT.2 9700.6,2241.9 9700.6,1891.6 9692.5,1883.6 DRALT.2
DRCTRL_2: DRCTRL.2 SRCTRL.2 | length 421
  Top Layer w10: DRCTRL.2 12497.5,1873.6 12500,1876.1 SRCTRL.2
DRSHIFT_2: DRSHIFT.2 SRSHIFT.2 | length 578.4
  Top Layer w10: DRSHIFT.2 11937.5,2628.6 11940.7,2631.7 v1(11940.7,2636.5)
  Bottom Layer w10: SRSHIFT.2 11938.8,2767.6 11843.1,2671.8 11843.1,2623.6 11852.7,2614 11918.1,2614 v1(11940.7,2636.5)
DRWIN_2: DRWIN.2 SRWIN.2 | length 414.2
  Top Layer w10: DRWIN.2 v1(10627.5,1886.1)
  Bottom Layer w10: v1(10627.5,1886.1) 10628.8,1887.4 SRWIN.2
DS_2: DS.2 SS.2 | length 410.2
  Top Layer w10: DS.2 v1(4162.5,3391)
  Bottom Layer w10: SS.2 4162.5,3750 v1(4162.5,3391)
DSPACE_2: DSPACE.2 SSPACE.2 | length 411
  Top Layer w10: SSPACE.2 6877.5,2247.5 DSPACE.2
DT_2: DT.2 ST.2 | length 425.1
  Top Layer w10: DT.2 6202.5,4143.6 6221.8,4143.6 v1(6228.8,4150.5)
  Bottom Layer w10: ST.2 6228.8,4493.7 v1(6228.8,4150.5)
DTAB_2: DTAB.2 STAB.2 | length 847.2
  Top Layer w10: STAB.2 2612.8,3753.7 2703.1,3663.4 2703.1,3638.6 2458,3393.6 2382.5,3393.6 DTAB.2
DTILDE_2: DTILDE.2 STILDE.2 | length 846.7
  Top Layer w10: DTILDE.2 2092.5,4873.6 2067.6,4898.5 2012,4898.5 1783.3,5127.2 1783.3,5180.1 1856.9,5253.7 STILDE.2
DU_2: DU.2 SU.2 | length 451.2
  Top Layer w10: v1(7689.5,4133.1) 7694.1,4128.6 7717.5,4128.6 DU.2
  Bottom Layer w10: v1(7689.5,4133.1) 7718.8,4162.4 SU.2
DV_2: DV.2 SV.2 | length 415.2
  Top Layer w10: SV.2 6037.5,3000 DV.2
DW_2: DW.2 SW.2 | length 449.7
  Top Layer w10: v1(3916.9,4153.8) 3926.6,4163.6 3952.5,4163.6 DW.2
  Bottom Layer w10: v1(3916.9,4153.8) 3968.8,4205.8 SW.2
DX_2: DX.2 SX.2 | length 412.3
  Top Layer w10: SX.2 4542.5,2995 DX.2
DY_2: DY.2 SY.2 | length 444.5
  Top Layer w10: v1(6950.5,4158.7) 6965.5,4143.6 6997.5,4143.6 DY.2
  Bottom Layer w10: v1(6950.5,4158.7) 6968.8,4177 SY.2
DZ_2: DZ.2 SZ.2 | length 414.2
  Top Layer w10: DZ.2 3782.5,2628.6 3783.8,2629.9 SZ.2
PCB1_1: CN1.1 PCB1.1 | length 12398.4
  Top Layer w10: v1(5991.3,3115) 6027,3115 6633.3,2508.7 9525.4,2508.7 9713.3,2696.6 12431.7,2696.6 12481.6,2746.5 13121.2,2746.5 13155,2712.7 13155,2650 CN1.1
  Bottom Layer w10: PCB1.1 3945,6963.9 4154.1,6754.8 4154.1,6040 5124.2,5070 5124.2,4741.3 5492.5,4373 5492.5,4112.7 5991.3,3613.9 v1(5991.3,3115)
PCB1_2: CN1.2 PCB1.2 | length 12416.5
  Top Layer w10: v1(6095,2505.5) 6107.9,2492.6 9540.1,2492.6 9728.1,2680.5 13024.5,2680.5 CN1.2
  Bottom Layer w10: PCB1.2 3996,6854 3996,5754.1 5104,4646.1 5104,4433.2 5588.2,3949 5588.2,3697.6 5654.8,3631 5654.8,2945.7 v1(6095,2505.5)
PCB1_3: CN1.3 PCB1.3 | length 13798.4
  Top Layer w10: PCB1.3 3886.1,7046.1 9507.9,7046.1 9719,6835 v1(13185.3,6835)
  Bottom Layer w10: v1(13185.3,6835) 13342.8,6677.5 13342.8,3076.4 13216.4,2950 13189.2,2950 13163.9,2924.7 13163.9,2881.6 13199.9,2845.6 13217.6,2845.6 13248.4,2814.7 13248.4,2743.4 CN1.3
PCB1_4: CN1.4 PCB1.4 | length 12105.4
  Top Layer w10: PCB1.4 3915,6835 v1(8785.7,6835) ; v1(10667.4,3069.3) v1(12538,3069.3)
  Bottom Layer w10: v1(8785.7,6835) 8785.7,6712 9262.4,6235.3 9262.4,6126.4 9869,5519.8 9869,4691.9 10460.1,4100.8 10460.1,3276.5 v1(10667.4,3069.3) ; v1(12538,3069.3) 12735.7,3069.3 CN1.4
PCB1_5: CN1.5 PCB1.5 | length 13243.1
  Top Layer w10: PCB1.5 3802.3,7062.3 10531.8,7062.3 v1(10539.4,7054.7) ; v1(11591.5,2829.6) 11591.5,2784.2 11662.9,2712.7 12425,2712.7 12556,2843.7 13161.3,2843.7 CN1.5
  Bottom Layer w10: v1(10539.4,7054.7) 10727.5,6866.6 10727.5,4966.7 11078.2,4616 11078.2,3343 v1(11591.5,2829.6)
PCB1_6: CN1.6 PCB1.6 | length 11434.8
  Top Layer w10: v1(10042.7,3089.9) 10059.5,3106.7 v1(12474.7,3106.7)
  Bottom Layer w10: PCB1.6 3795,6955 3861.1,6955 3903.9,6997.8 3903.9,7043.2 3906.8,7046.1 3985,7046.1 3987.9,7043.2 3987.9,6943.8 4629,6302.7 4629,6033.2 5844.8,4817.4 6093,4817.4 6106.5,4803.9 6106.5,4802.3 6809.3,4099.5 8627.7,4099.5 9637.4,3089.9 v1(10042.7,3089.9) ; v1(12474.7,3106.7) 12798.3,3106.7 CN1.6
PCB1_9: CN1.9 PCB1.9 | length 13718
  Top Layer w10: PCB1.9 3634.6,7094.5 10647.7,7094.5 v1(10671.9,7070.4) ; v1(11786,2893.2) 12695.4,2893.2 13043.4,3241.1 13122.6,3241.1 13149.3,3214.4 13149.3,3055.7 CN1.9
  Bottom Layer w10: v1(10671.9,7070.4) 11495.4,6246.9 11495.4,4677.8 11529.5,4643.7 11529.5,4411.3 11524.2,4406.1 11524.2,4165.7 11545.6,4144.3 11545.6,2959.9 11664.6,2840.9 11733.7,2840.9 v1(11786,2893.2)
PCB1_11: CN1.11 PCB1.11 | length 12466.3
  Top Layer w10: v1(5413.3,3280.9) 5413.3,3254 5456.9,3210.4 12587.6,3210.4 v1(12603.7,3194.3)
  Bottom Layer w10: PCB1.11 3495,6955 3560.8,6955 3586.1,6929.7 3586.1,6690.1 3923.5,6352.7 3923.5,5692.3 4224.6,5391.2 4224.6,5248.4 4381.3,5091.7 4381.3,4983.9 5288.2,4077 5288.2,3395.7 5354.3,3329.7 5364.5,3329.7 v1(5413.3,3280.9) ; v1(12603.7,3194.3) 12655.7,3142.3 13162.7,3142.3 CN1.11
PCB1_13: CN1.13 PCB1.13 | length 13609.4
  Top Layer w10: PCB1.13 3450.7,7110.7 10991.5,7110.7 11234.7,6867.5 v1(12882.5,6867.5)
  Bottom Layer w10: v1(12882.5,6867.5) 12882.5,6749.8 13294.4,6337.9 13294.4,3424.1 13220.3,3350 13189.2,3350 13163.9,3324.7 13163.9,3241.1 CN1.13
PCB1_14: CN1.14 PCB1.14 | length 12225.4
  Top Layer w10: v1(5467.5,3234.9) 5470.5,3231.9 v1(12639.5,3231.9)
  Bottom Layer w10: PCB1.14 3907.4,6342.6 3907.4,5542.8 4365.2,5085 4365.2,4968.3 5257.1,4076.4 5257.1,3404 5426.3,3234.9 v1(5467.5,3234.9) ; v1(12639.5,3231.9) 12671.4,3200 CN1.14
PCB1_15: CN1.15 PCB1.15 | length 13455.2
  Top Layer w10: PCB1.15 3287.5,6962.5 5319.4,6962.5 5328.2,6971.3 9497.9,6971.3 9685.8,6783.4 v1(12906.8,6783.4)
  Bottom Layer w10: v1(12906.8,6783.4) 13310.5,6379.6 13310.5,3405.5 CN1.15
PCB1_17: CN1.17 PCB1.17 | length 13187
  Top Layer w10: PCB1.17 3282.9,7142.9 11919.1,7142.9 v1(11934.6,7127.4) ; v1(13170.4,3434.6) CN1.17
  Bottom Layer w10: v1(11934.6,7127.4) 13246.1,5815.9 13246.1,3881.7 13214.4,3850 13196.1,3850 13162.2,3816.1 13162.2,3442.8 v1(13170.4,3434.6)
PCB1_19: CN1.19 PCB1.19 | length 12330.8
  Top Layer w10: v1(7550,5635) 7854.3,5330.6 11180.8,5330.6 11765.5,4746 12921.7,4746 13155,4512.6 13155,4484.2 13180.3,4458.9 13208.1,4458.9 13249.2,4417.8 13249.2,3784.7 13214.4,3750 13189.2,3750 13163.9,3724.7 13163.9,3541.1 CN1.19
  Bottom Layer w10: PCB1.19 3109.3,7069.3 5062.8,7069.3 5825.2,6306.8 5958.8,6306.8 6630.6,5635 v1(7550,5635)
PCB1_20: CN1.20 PCB1.20 | length 12573.4
  Top Layer w10: v1(5436.2,3181.3) 12526,3181.3 v1(12529.8,3185.1)
  Bottom Layer w10: PCB1.20 3404.4,6545.6 3404.4,5342.9 3601.9,5145.4 3601.9,5057.6 4452.4,4207.1 4552.2,4207.1 5110.8,3648.6 5110.8,3506.8 v1(5436.2,3181.3) ; v1(12529.8,3185.1) 12731.6,3386.9 12991.9,3386.9 CN1.20
PCB1_21: CN1.21 PCB1.21 | length 13598.7
  Top Layer w10: PCB1.21 2978.9,7005 3020,6963.9 3170.4,6963.9 3195,6988.5 3195,7013.1 3308.6,7126.8 11006.2,7126.8 11037.8,7095.2 v1(12643,7095.2)
  Bottom Layer w10: v1(12643,7095.2) 12643,6847.4 13278.3,6212.1 13278.3,3673.3 CN1.21
PCB1_23: CN1.23 PCB1.23 | length 12361.1
  Top Layer w10: PCB1.23 2903.9,6946.1 2969.7,6946.1 2995,6920.8 2995,6893.8 3255.9,6632.9 6103.4,6632.9 6721.6,6014.7 8407.1,6014.7 8426.1,5995.7 8426.1,5944.8 9015.1,5355.9 11536.6,5355.9 12013.9,4878.6 12169.6,4878.6 12192.8,4855.4 12192.8,4804.3 12213.1,4784.1 12985.9,4784.1 13265.3,4504.7 13265.3,3760.3 CN1.23
PCB1_25: CN1.25 PCB1.25 | length 13578.2
  Top Layer w10: PCB1.25 2900.4,7160.4 v1(12600.8,7160.4)
  Bottom Layer w10: v1(12600.8,7160.4) 12600.8,6852.4 13262.2,6191 13262.2,3857.2 CN1.25
PCB1_30: CN1.30 PCB1.30 | length 12913.7
  Top Layer w10: v1(2630,4894.8) 3370,4894.8 3700.8,4564 12216.3,4564 12425.8,4354.5 v1(12750.5,4354.5)
  Bottom Layer w10: PCB1.30 2657.3,6792.7 2657.3,5127 2630,5099.7 v1(2630,4894.8) ; v1(12750.5,4354.5) CN1.30
PCB1_34: CN1.34 PCB1.34 | length 13229.6
  Top Layer w10: v1(2372.6,4910.4) 2380.5,4918.3 3606.1,4918.3 3940.5,4583.9 12423.4,4583.9 12548.9,4458.4 13110.5,4458.4 13148.2,4420.7 13148.2,4243.2 CN1.34
  Bottom Layer w10: PCB1.34 2372.6,6877.4 v1(2372.6,4910.4)
PCB1_39: CN1.39 PCB1.39 | length 12904.5
  Top Layer w10: PCB1.39 2087.7,6962.3 2764.3,6962.3 2797.6,6995.5 2797.6,7016.8 2833.4,7052.6 2855.5,7052.6 2889.3,7018.8 2889.3,7001.9 2927.3,6963.9 2989.2,6963.9 3005.3,6947.8 3260.5,6947.8 3295,6913.2 3295,6892.9 3459,6728.9 11949,6728.9 v1(11955,6723)
  Bottom Layer w10: v1(11955,6723) 11990.3,6723 12407.4,6305.8 12407.4,6235.2 12398.6,6226.3 12398.6,5306.4 CN1.39
ROW1: CN1.35 CN1.37 PCB1.35 PCB1.37 S0.1 S1.1 S2.1 S3.1 S4.1 S5.1 S6.1 S7.1 S8.1 S9.1 S-.1 S=.1 SBACKSPACE.1 SESC.1 SF1.1 SF2.1 SF3.1 SF4.1 SF5.1 SF6.1 SF7.1 SF8.1 SF9.1 SF10.1 SF11.1 SF12.1 STILDE.1 | length 26091.3
  Top Layer w10: STILDE.1 S1.1 S2.1 3350.6,5146.9 4087,5146.9 S3.1 ; PCB1.37 PCB1.35 ; SF1.1 3504.1,6439 3933.5,6439 SF2.1 ; S4.1 S5.1 S6.1 ; SF3.1 5004.1,6439 5433.5,6439 SF4.1 ; SF5.1 SF6.1 SF7.1 ; S7.1 S8.1 S9.1 ; S0.1 9504.6,5314.5 10093.8,5314.5 ; S-.1 10093.8,5314.5 ; SF9.1 10255,6439.9 10843.8,6439.9 ; S=.1 10683,5314.5 10093.8,5314.5 ; SF10.1 10843.8,6439.9 ; SF11.1 11593.8,6439.9 ; SF12.1 12182.6,6439.9 11593.8,6439.9 ; 10843.8,6439.9 11593.8,6439.9
  Bottom Layer w10: STILDE.1 SESC.1 1843.8,6763.6 2035.2,6955 2095,6955 PCB1.37 ; S2.1 SF1.1 ; SF2.1 4093.8,5903.7 S4.1 ; S5.1 SF4.1 ; S6.1 S7.1 ; SF7.1 8614.9,6278.7 ; S9.1 S9.1@8614.9,5174.8 ; SF8.1 8614.9,6278.7 ; S0.1 8636,5153.7 S9.1@8614.9,5174.8 ; S-.1 SF9.1 ; SBACKSPACE.1 12211.1,5153.7 12298.9,5241.5 ; SF12.1 12343.8,5286.4 12298.9,5241.5 ; CN1.35 CN1.37 13155,4450 13090.3,4450 12298.9,5241.5 ; S9.1@8614.9,5174.8 8614.9,6278.7
ROW2: CN1.33 PCB1.33 S[.1 S\.1 S].1 SE.1 SI.1 SO.1 SP.1 SQ.1 SR.1 ST.1 STAB.1 SU.1 SW.1 SY.1 | length 14938
  Top Layer w10: STAB.1 v1(2676.5,3653.7) ; SQ.1 SW.1 SE.1 SR.1 ST.1 SY.1 SU.1 SI.1 SO.1 SP.1 S[.1 S].1 S\.1
  Bottom Layer w10: PCB1.33 2393.6,7053.6 2758.7,7053.6 2795,7017.3 2795,6990.6 2833.1,6952.5 2862.1,6952.5 2895,6919.6 2895,5318.5 2906.8,5306.7 2906.8,5090.2 2899,5082.4 2899,4473.5 SQ.1@2961.1,4411.4 ; v1(2676.5,3653.7) 2676.5,4126.7 SQ.1@2961.1,4411.4 ; SQ.1 SQ.1@2961.1,4411.4 ; S\.1 12882.9,4403.7 13036.6,4250 13155,4250 CN1.33
ROW3: CN1.31 PCB1.31 S'.1 S;.1 SA.1 SCAPS.1 SD.1 SENTER.1 SF.1 SG.1 SH.1 SJ.1 SK.1 SL.1 SS.1 | length 14645.7
  Top Layer w10: v1(2471.2,4195) v1(2873.9,4195) ; SA.1 SS.1 SD.1 SF.1 SG.1 SH.1 SJ.1 SK.1 SL.1 9908.8,3653.7 S'.1 SENTER.1 11878.8,3694.9 12232.9,4049 12232.9,4054.6 12246.4,4068.1 12252,4068.1 12327.4,4143.5 13161.5,4143.5 CN1.31
  Bottom Layer w10: SCAPS.1 2251.8,4621.7 ; PCB1.31 2395.7,6955.6 2395.7,4765.6 2251.8,4621.7 ; v1(2471.2,4195) 2471.2,4402.2 2251.8,4621.7 ; v1(2873.9,4195) 2873.9,3938.6 SA.1
ROW4: CN1.29 PCB1.29 S,.1 S..1 S/.1 SB.1 SC.1 SLSHIFT.1 SM.1 SN.1 SRSHIFT.1 SV.1 SX.1 SZ.1 | length 16461.4
  Top Layer w10: SLSHIFT.1 SZ.1 3696.9,3066.8 4120.7,3066.8 SX.1 ; SC.1 5195.4,3065.3 5622.2,3065.3 SV.1 ; SB.1 SN.1 7445.7,3065.6 7871.9,3065.6 SM.1 ; 8783.8,2903.7 S..1 9539.3,2909.3 10278.2,2909.3 S/.1 10289.3,2909.3 11683.2,2909.3 SRSHIFT.1
  Bottom Layer w10: SLSHIFT.1 2313.8,3462.2 2494.3,3642.7 2494.3,6954.3 PCB1.29 ; SX.1 4283.8,2791.5 4456.6,2618.7 4655.2,2618.7 4940.2,2903.7 SC.1 ; SV.1 SB.1 ; SM.1 8033.8,2827.1 8150.4,2710.6 8218.8,2710.6 8412,2903.7 8783.8,2903.7 ; SRSHIFT.1 12735.1,3950 13155,3950 CN1.29
ROW5: CN1.27 PCB1.27 SFN.1 SLALT.1 SLCTRL.1 SLWIN.1 SRALT.1 SRCTRL.1 SRWIN.1 SSPACE.1 | length 18152.5
  Top Layer w10: SLCTRL.1 SLWIN.1 SLALT.1 5410.3,2153.7 5885.2,2628.6 5988.2,2628.6 5991.1,2625.7 5991.1,2570 6411.1,2150 SSPACE.1 6786.1,2311.1 9281.4,2311.1 SRALT.1
  Bottom Layer w10: PCB1.27 2689.9,6960.1 2689.9,5136.8 2653.4,5100.3 2653.4,3105.9 2878.8,2880.5 SLWIN.1 ; SRALT.1 SRWIN.1 10539.4,2314.3 11155.7,2314.3 SFN.1 SRCTRL.1 12250,2938 13062,3750 13113.7,3750 13146.1,3782.4 13146.1,3841.1 CN1.27
SESC_2: DESC.2 SESC.2 | length 359.2
  Top Layer w10: DESC.2 2092.5,6058.6 2093.8,6059.9 SESC.2
SF1_2: DF1.2 SF1.2 | length 419.2
  Top Layer w10: DF1.2 3592.5,6377.4 SF1.2
SF2_2: DF2.2 SF2.2 | length 421.3
  Top Layer w10: DF2.2 v1(4337.5,6006)
  Bottom Layer w10: v1(4337.5,6006) 4343.8,6012.3 SF2.2
SF3_2: DF3.2 SF3.2 | length 419.2
  Top Layer w10: DF3.2 5092.5,5998.6 5093.8,5999.9 SF3.2
SF4_2: DF4.2 SF4.2 | length 419.2
  Top Layer w10: DF4.2 5842.5,5998.6 5843.8,5999.9 SF4.2
SF5_2: DF5.2 SF5.2 | length 541.7
  Top Layer w10: v1(6935.5,5921.4) 6967.5,5921.4 DF5.2
  Bottom Layer w10: v1(6935.5,5921.4) 6968.8,5954.7 SF5.2
SF6_2: DF6.2 SF6.2 | length 470.6
  Top Layer w10: DF6.2 v1(7754.6,5960)
  Bottom Layer w10: SF6.2 7718.8,5995.8 v1(7754.6,5960)
SF7_2: DF7.2 SF7.2 | length 420.2
  Top Layer w10: SF7.2 8472.5,6375 DF7.2
SF8_2: DF8.2 SF8.2 | length 419.2
  Top Layer w10: DF8.2 9217.5,5998.6 9218.8,5999.9 SF8.2
SF9_2: DF9.2 SF9.2 | length 420.2
  Top Layer w10: SF9.2 10347.5,6375 DF9.2
SF10_2: DF10.2 SF10.2 | length 419.2
  Top Layer w10: DF10.2 11092.5,5998.6 11093.8,5999.9 SF10.2
SF11_2: DF11.2 SF11.2 | length 420.2
  Top Layer w10: SF11.2 11847.5,6375 DF11.2
SF12_2: DF12.2 SF12.2 | length 414.2
  Top Layer w10: DF12.2 12592.5,6003.6 12593.8,6004.9 SF12.2
pads on no net: S0. S1. S2. S3. S4. S5. S6. S7. S8. S9. S'. S,. S-. S.. S/. S;. S=. S[. S\. S]. SA. SB. SBACKSPACE. SC. SCAPS. SD. SE. SENTER. SESC. SF1. SF2. SF3. SF4. SF5. SF6. SF7. SF8. SF9. SF10. SF11. SF12. SF. SFN. SG. SH. SI. SJ. SK. SL. SLALT. SLCTRL. SLSHIFT. SLWIN. SM. SN. SO. SP. SQ. SR. SRALT. SRCTRL. SRSHIFT. SRWIN. SS. SSPACE. ST. STAB. STILDE. SU. SV. SW. SX. SY. SZ.

## Other copper
Top Layer:
  text "Raspberry Pi Zero Keyboard / Design By Spaceless" at 10900,7395 h80

## Silkscreen, mask and mechanical layers (free items; w line width, h text height)
Document:
  lines w0.1: 7429,5454 7431,5456